# Altium PCB PCB.PcbDoc (part 2 of 2)
Units mm, origin at the board's own origin, x right, y up, seen from the top; angles counter-clockwise.
Board outline 94 x 82 mm, 2 copper layers (Top Layer, Bottom Layer); 51 components, 51 nets, 202 pads, 619 vias.
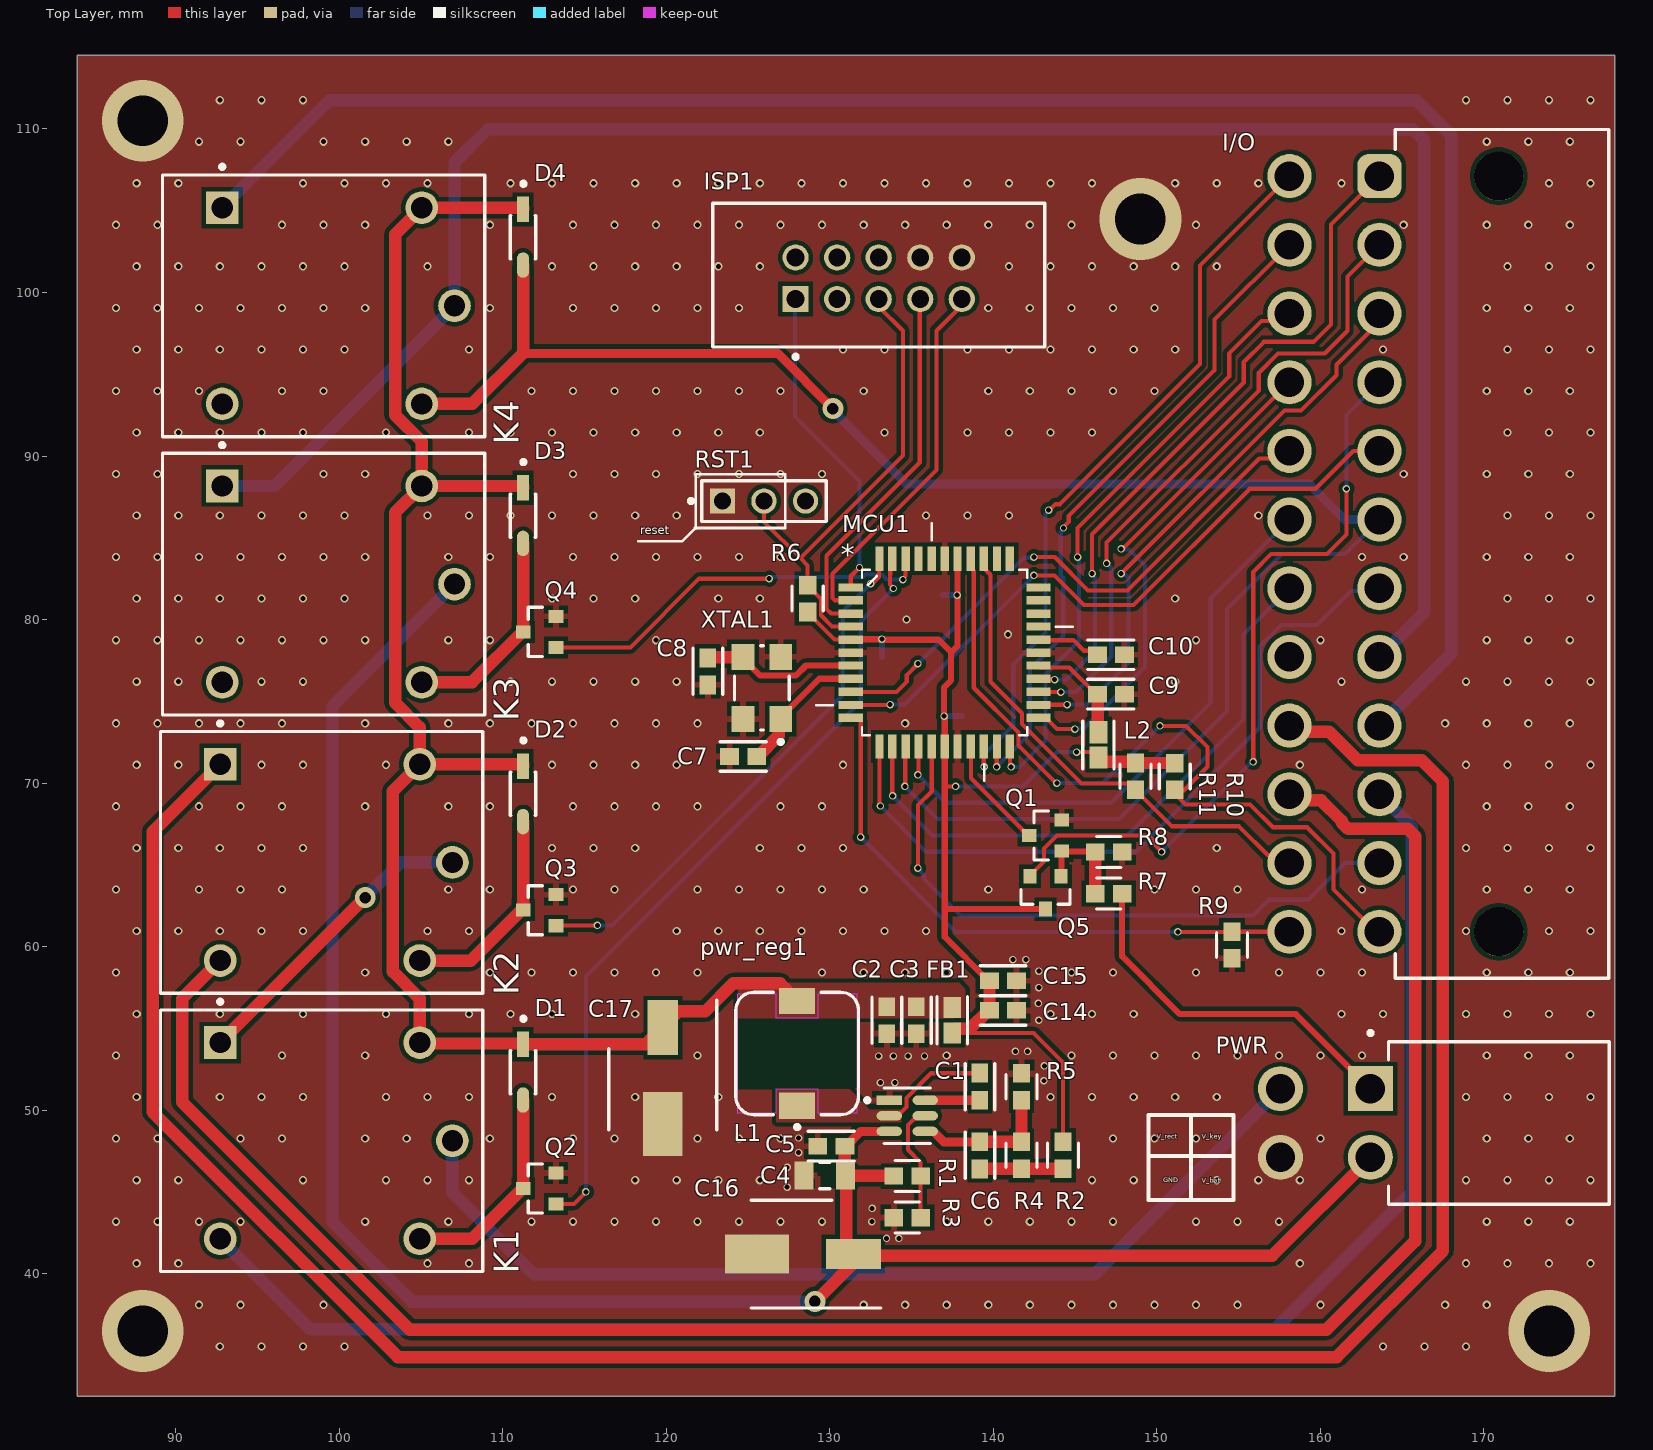
[diagram p0: Top Layer view]

## Via types
v1: diameter 0.5, hole 0.305, Top Layer to Bottom Layer, tented both sides, 546 vias
v2: diameter 0.457, hole 0.305, Top Layer to Bottom Layer, tented both sides, 66 vias
v3: diameter 5, hole 3.1, Top Layer to Bottom Layer, 4 vias
v4: diameter 1.27, hole 0.711, Top Layer to Bottom Layer, tented both sides, 3 vias

## Nets (pads, with @x,y where several pads share a name; then routed paths per layer and width w, separated by ;. In a path a pad name is that pad's centre, name@x,y a point inside that pad or via, vN(x,y) a via of type N, cw(c..) or ccw(c..) an arc to the next point about the centre after c; other vN are vias at no path point) (continued)
LIGHT_MCU: K1.1 K2.3 | length 18.8
  Top Layer w0.762: K1.1 v4(101.6,63)
  Bottom Layer w0.762: v4(101.6,63) 103.751,65.151 K2.3
LIGHT_MODE: MCU1.43 Q2.1 | length 48.8
  Top Layer w0.254: Q2.1 114.362,44.262 v2(115.1,45) ; MCU1.43 133.706,83.591 133.706,82.753 133.701,82.748 133.701,82.154 133.9,81.955 v2(133.9,81.9)
  Bottom Layer w0.254: v2(115.1,45) 115.1,58.181 131.9,74.981 131.9,79.9 v2(133.9,81.9)
LIGHT_SET: MCU1.44 Q3.1 | length 32.7
  Top Layer w0.254: Q3.1 113.288,61.3 v2(115.8,61.3) ; v2(132.512,82.2) 132.551,82.239 132.661,82.239 133.023,82.601 133.023,83.696 MCU1.44
  Bottom Layer w0.254: v2(115.8,61.3) 116.7,61.3 130.8,75.4 130.8,80.488 v2(132.512,82.2)
LIGHT_SWITCH: I/O.10 K1.4 | length 103.8
  Bottom Layer w0.762: K1.4 98.266,36.6 157.2,36.6 165.6,45 165.6,67.33 I/O.10
MISO: ISP1.9 MCU1.2 | length 22.4
  Top Layer w0.254: MCU1.2 130.321,81.178 130.173,81.327 130.173,82.802 136.525,89.154 136.525,97.663 138.049,99.187 ISP1.9@138.049,99.314
MOSI: ISP1.1 MCU1.1 | length 19.2
  Top Layer w0.254: MCU1.1 131.293,82.652 v2(131.826,83.185)
  Bottom Layer w0.254: ISP1.1@127.889,99.314 127.889,92.411 131.826,88.474 v2(131.826,83.185)
NetC1_1: C1.1 pwr_reg1.6 | length 3.3
  Top Layer w0.559: pwr_reg1.6 C1.1
NetC1_2: C1.2 L1.1 pwr_reg1.2 | length 6.9
  Top Layer w0.254: pwr_reg1.2 134.155,49.657 134.703,50.205 134.703,50.754 136.211,52.262 C1.2
NetC6_1: C6.1 R2.2 R4.1 | length 5.2
  Top Layer w0.762: C6.1 139.198,46.423 141.726,46.423 R4.1 R2.2 144.198,46.355 R2.2@144.145,46.355
NetC6_2: C6.2 pwr_reg1.4 R4.2 R5.1 | length 8.7
  Top Layer w0.559: pwr_reg1.4 136.342,48.707 136.984,48.065 C6.2@139.198,48.065
  Top Layer w0.762: C6.2@139.198,48.065 141.726,48.065 R4.2 R5.1
NetC9_1: C9.1 L2.1 MCU1.27 | length 6.9
  Top Layer w0.254: MCU1.27 142.886,77.078 144.653,77.078 146.293,75.438 C9.1
  Top Layer w0.762: C9.1 146.398,75.405 146.398,72.944 L2.1@146.431,72.911
NetC10_1: C10.1 MCU1.29 | length 4
  Top Layer w0.254: MCU1.29 142.799,78.74 144.907,78.74 145.555,78.092 146.125,78.092 C10.1
NetD1_2: D1.2 K1.5 Q2.3 | length 13
  Top Layer w0.762: K1.5 108.139,42.133 111.218,45.212 Q2.3 111.26,45.22 111.26,50.616 D1.2
NetD2_2: D2.2 K2.5 Q3.3 | length 12.9
  Top Layer w0.762: K2.5 108.062,59.151 111.252,62.341 D2.2
NetD3_2: D3.2 K3.5 Q4.3 | length 12.9
  Top Layer w0.762: K3.5 108.139,76.169 111.234,79.264 111.252,79.264 D3.2
Netpwr_reg1_5: pwr_reg1.5 R1.2 R3.1 | length 7.3
  Top Layer w0.254: R3.1 R1.2 135.562,46.81 134.791,47.581 134.791,49.092 135.356,49.657 pwr_reg1.5
pV_reg: C2.1 C3.1 C17.1 D1.1 D2.1 D3.1 D4.1 FB1.1 K1.2 K2.2 K3.2 K4.2 L1.2 | length 99.4
  Top Layer w0.762: D2.1 111.252,71.141 111.242,71.151 K2.2 ; D3.1 111.252,88.159 111.242,88.169 K3.2 ; D4.1 111.252,105.177 111.242,105.187 K4.2 103.425,103.552 103.425,92.51 105.06,90.875 K3.2 ; L1.2 127.77,56.667 127.351,57.086 127.351,57.38 126.979,57.752 124.103,57.752 122.401,56.05 120.75,56.05 118.724,54.024 D1.1 111.252,54.069 111.242,54.079 104.987,54.079 K1.2 104.933,56.839 103.298,58.474 103.298,69.516 K2.2 ; K2.2 104.933,73.412 103.425,74.92 103.425,86.534 K3.2
RPM: I/O.24 MCU1.11 R9.1 | length 36.4
  Top Layer w0.254: MCU1.11 131.773,73.99 131.9,73.863 v2(131.9,66.7) ; v2(151.3,60.9) 154.585,60.9 R9.1 ; R9.1 I/O.24
  Bottom Layer w0.254: v2(131.9,66.7) 137.7,60.9 v2(151.3,60.9)
RST: ISP1.5 MCU1.4 R6.2 RST1.2 | length 29.2
  Top Layer w0.254: RST1.2 125.984,85.979 128.207,83.757 ; MCU1.4@131.166,79.578 130.147,79.578 129.461,80.264 129.461,81.248 128.651,82.059 R6.2 128.651,83.312 128.207,83.757 ; ISP1.5@132.969,99.314 132.969,99.187 134.493,97.663 134.493,90.043 128.207,83.757
RX: I/O.17 MCU1.9 | length 34.8
  Top Layer w0.254: MCU1.9 131.305,75.578 134.078,75.578 134.719,76.219 134.719,76.619 v2(135.4,77.3) ; v2(142.494,83.82) 143.764,83.82 145.796,81.788 148.209,81.788 156.268,89.847 157.647,89.847 I/O.17
  Bottom Layer w0.254: v2(135.4,77.3) 141.884,83.784 142.458,83.784 v2(142.494,83.82)
SCK: ISP1.7 MCU1.3 | length 22.5
  Top Layer w0.254: MCU1.3@131.166,80.366 130.096,80.366 129.817,80.645 129.817,83.903 135.509,89.595 ISP1.7@135.509,99.314
SET_KEY: I/O.7 MCU1.12 | length 44.9
  Top Layer w0.254: MCU1.12 133.045,68.71 133.1,68.655 v2(133.1,68.6)
  Bottom Layer w0.254: v2(133.1,68.6) 135.9,65.8 148.7,65.8 156.3,73.4 156.3,78.348 157.617,79.666 159.803,79.666 161.884,81.747 163.447,81.747 I/O.7
STAND_KEY: I/O.18 MCU1.15 | length 36.1
  Top Layer w0.254: v2(135.4,70.5) 135.433,70.533 MCU1.15
  Bottom Layer w0.254: v2(135.4,70.5) 137.1,68.8 147.2,68.8 153.3,74.9 153.3,81.3 I/O.18
TMP: I/O.12 MCU1.37 R10.2 | length 49.2
  Top Layer w0.254: MCU1.37 138.76,83.591 138.76,83.011 138.811,82.96 138.811,75.833 141.555,73.089 141.555,72.313 v2@143.884,69.984 ; v2(150.2,73.5) 151.8,73.5 153.1,72.2 153.1,71 151.663,69.563 151.304,69.563 151.282,69.541 R10.2@151.282,69.182 ; R10.2@150.9,69.6 R10.2@150.9,69.564 ; I/O.12 163.385,60.915 160.8,63.5 160.8,65.7 159.2,67.3 157.1,67.3 155.7,68.7 151.764,68.7 R10.2@151.282,69.182 ; R10.2@150.9,69.564 R10.2@151.282,69.182 ; R10.2@150.9,69.564 R10.2@151.282,69.182
  Bottom Layer w0.254: v2(143.9,70) 146.7,70 v2(150.2,73.5)
TX: I/O.5 MCU1.10 | length 40.3
  Top Layer w0.254: MCU1.10 133.678,74.778 v2(133.7,74.8) ; v2(142.494,82.702) 143.739,82.702 145.542,80.899 148.59,80.899 155.691,88 159.7,88 162.015,90.315 I/O.5
  Bottom Layer w0.254: v2(133.7,74.8) 134.592,74.8 v2(142.494,82.702)
V_reg: C11.1 C12.1 C13.1 C14.1 C15.1 FB1.2 L2.2 MCU1.5 MCU1.17 MCU1.38 Q5.3 R2.1 R6.1 R10.1 R11.1 | length 78.5
  Top Layer w0.254: R6.1@128.651,80.501 R6.1 128.651,80.428 130.302,78.777 MCU1.5@131.154,78.777 ; 137.033,69.85 137.083,69.8 v2(137.7,69.8) ; FB1.2 142.476,54.724 144.272,52.928 R2.1 ; v2(145.1,71.9) 146.005,71.9 146.431,71.474 L2.2@146.431,71.361
  Top Layer w0.381: MCU1.5 131.327,78.8 v2(133.2,78.8) ; v2@133.2,78.765 136.671,78.765 137.427,78.01 ; MCU1.38 137.82,78.403 137.427,78.01 ; C15.1 139.704,57.922 137.033,60.593 137.033,62.301 ; Q5.3 143.199,62.301 137.033,62.301 ; 137.033,62.301 137.033,69.85 MCU1.17 137.033,74.046 137,74.079 v2(137,74.1) 137,75.852 137.427,76.279 137.427,78.01
  Top Layer w0.762: FB1.2 137.5,54.848 137.648,54.996 138.596,54.996 139.7,56.1 C14.1 139.775,56.102 139.775,57.92 C15.1 ; L2.2@146.431,71.361 146.496,71.296 148.635,71.296 R11.1 R10.1@150.9,71.231
  Bottom Layer w0.254: v2(137.7,69.8) 141.809,69.8 143.909,71.9 v2(145.1,71.9)
  Bottom Layer w0.381: C13.1 v2(133.2,78.8) ; C12.1 v2(137.8,81.5) ; v2(137,74.1) C11.1
VCC_bat: C4.1 C5.1 C16.1 K3.3 PWR.2 pwr_reg1.3 R1.1 | length 124.6
  Top Layer w0.559: C5.1 131,47.8 131.907,48.707 pwr_reg1.3
  Top Layer w0.762: v4@129.119,38.3 131.77,40.95 C16.1@131.62,41.1 ; C5.1 130.927,46 C4.1@130.94,45.987 ; R1.1 133.919,45.987 131.376,45.987 C4.1@130.94,45.987 ; PWR.2 157.051,41.1 C16.1@131.62,41.1 ; C4.1@130.94,45.987 131.002,45.925 131.002,41.718 C16.1@131.62,41.1
  Bottom Layer w0.762: K3.3 99.6,74.709 99.6,43.148 104.448,38.3 v4(129.1,38.3)
VCC_k: PWR.1 R7.2 | length 22.4
  Top Layer w0.381: R7.2 147.881,59.419 151.42,55.88 158.505,55.88 PWR.1
VCC_rect: K1.3 PWR.3 | length 60.6
  Bottom Layer w0.762: K1.3 106.933,44.959 111.935,39.957 146.208,39.957 PWR.3
X1: C7.2 MCU1.8 XTAL1.1 | length 8.3
  Top Layer w0.381: XTAL1.1 127.007,74.019 129.366,76.378 MCU1.8
  Top Layer w0.762: C7.2 125.614,71.628 126.884,72.898 126.884,73.796 XTAL1.1
X2: C8.2 MCU1.7 XTAL1.3 | length 9.5
  Top Layer w0.381: XTAL1.3 124.707,77.619 125.75,76.576 127.941,76.576 128.555,77.191 MCU1.7
  Top Layer w0.762: C8.2 122.583,77.69 124.678,77.69 XTAL1.3
pads on no net: I/O.20 I/O.MH1 I/O.MH2 ISP1.2 ISP1.3 ISP1.4 ISP1.6 K3.4 K4.4 MCU1.30 MCU1.31 MCU1.32 MCU1.33 MCU1.34 MCU1.35 MCU1.40 MCU1.41 RST1.3

## Polygon pours and split planes (outlines as drawn)
GND on Top Layer "GND_L01_P003" (solid, pour order 3): 84,114.5 84,32.5 178,32.5 178,114.5
pV_reg on Top Layer "PV_REG_L01_P002" (solid, pour order 2): 138.3,55.626 124.4,55.626 124.4,57.6 124.585,57.785 137.915,57.785 138.3,57.4
NetC1_2 on Top Layer "NETC1_2_L01_P000" (solid, pour order 0): 134.366,49.276 126.746,49.276 126.746,51.237 126.716,51.267 126.757,51.308 131.191,51.308 132.461,50.038 134.366,50.038
GND on Bottom Layer "GND_L02_P007" (solid, pour order 7): 84,114.5 177.927,114.5 177.927,32.5 84,32.5

## Other copper
Top Layer:
  pour cut-out: 131.699,55.626 124.333,55.626 124.333,51.267 131.531,51.267 131.704,51.44
  pour cut-out: 131.704,55.626 124.333,55.626 124.333,51.435 131.699,51.435 131.704,51.44

## Silkscreen, mask and mechanical layers (free items; w line width, h text height)
Top Overlay:
  lines w0.154: 118.3,84.8 121,84.8 121.8,85.6 ; 121.8,85.6 127.3,85.6 127.3,88.9 121.8,88.9 121.8,85.6 ; 121.8,85.6 121.8,85.6
  lines w0.254: 149.6,47.2 154.6,47.2 ; 152.1,44.5 152.1,49.6 ; 121.8,85.6 121.8,85.6 ; 149.5,44.5 154.7,44.5 154.7,49.7 149.5,49.7 149.5,44.5
  text "reset" at 118.433,85.215 h0.52
  text "V_rect" at 150,48.25 h0.3
  text "V_key" at 152.739,48.246 h0.3
  text "GND" at 150.4,45.6 h0.3
  text "V_bat" at 152.748,45.573 h0.3
Bottom Overlay:
  text "PCrs v2.1" at 168.791,38.3 h2
  text "by Maksymilian Mazur" at 168.791,35.1 h1.5

## Text inside footprints (layer, text, board x,y; h text height)
MCU1: Top Overlay "*" at 130.683,83.312 h1.27; Mechanical 13 "*" at 129.337,82.118 h1.27